# EAGLE board DAC_GainOutputStage3 (EAGLE 9.6.2)
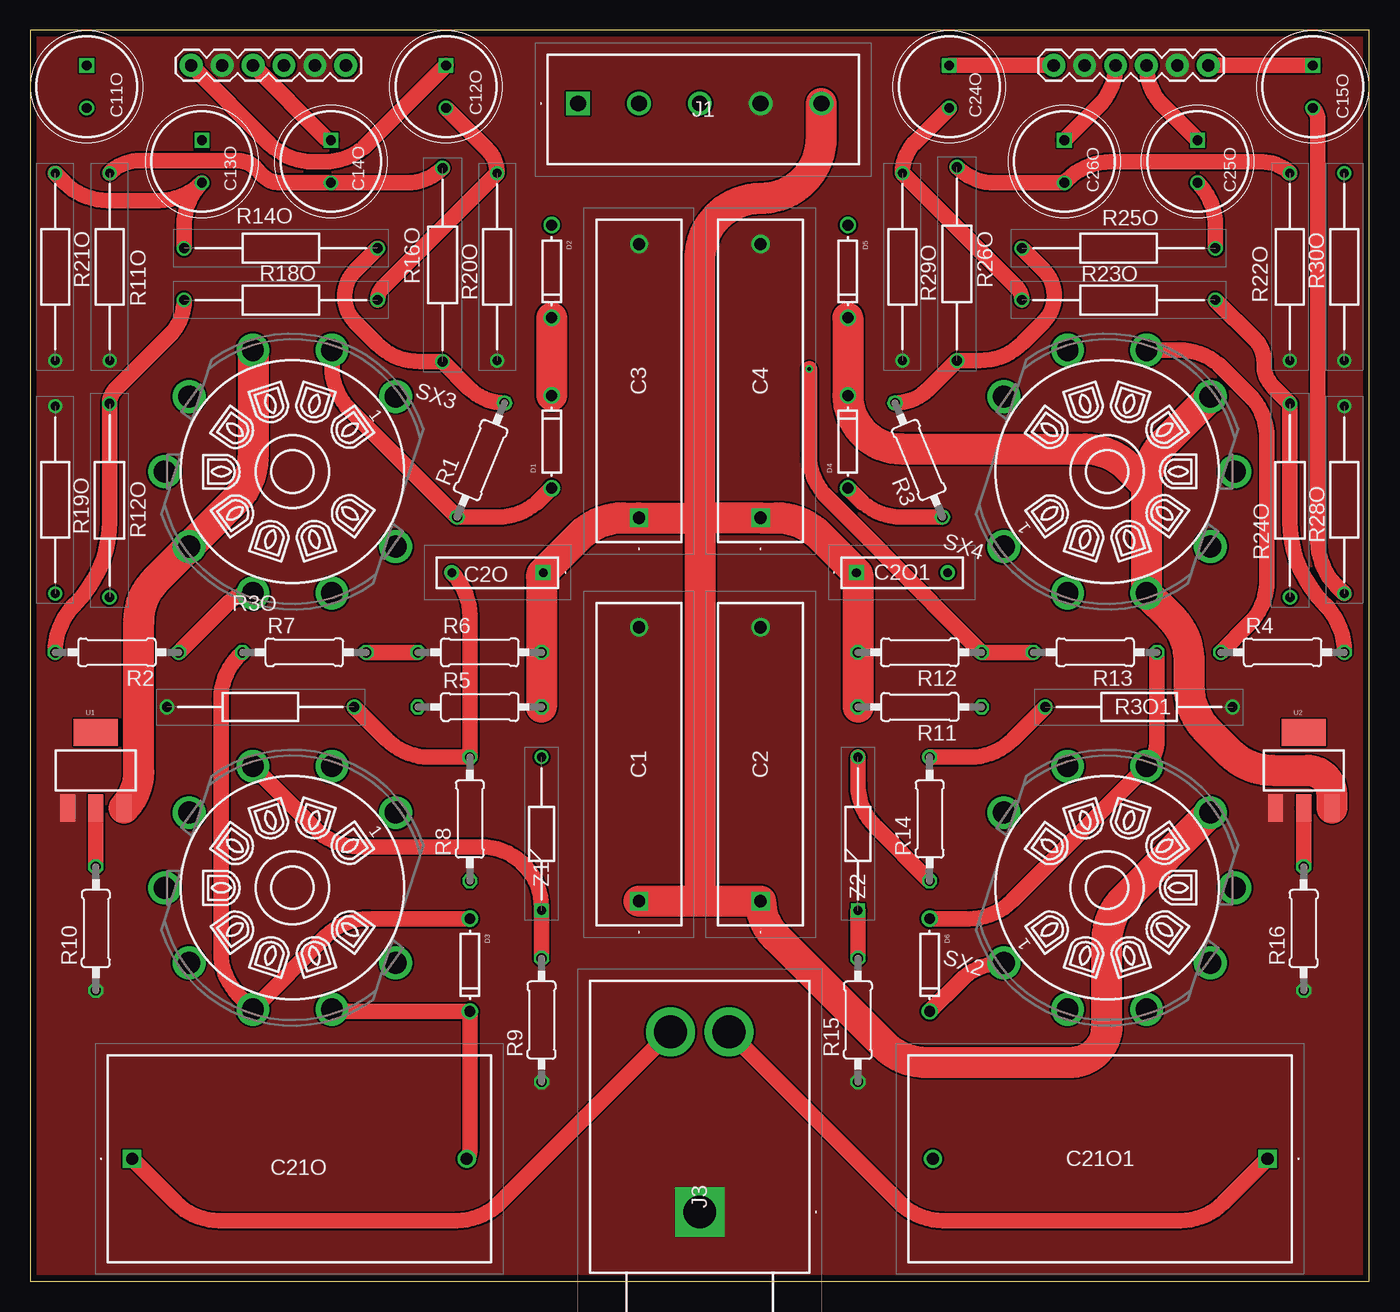
[diagram p0: board, top side]
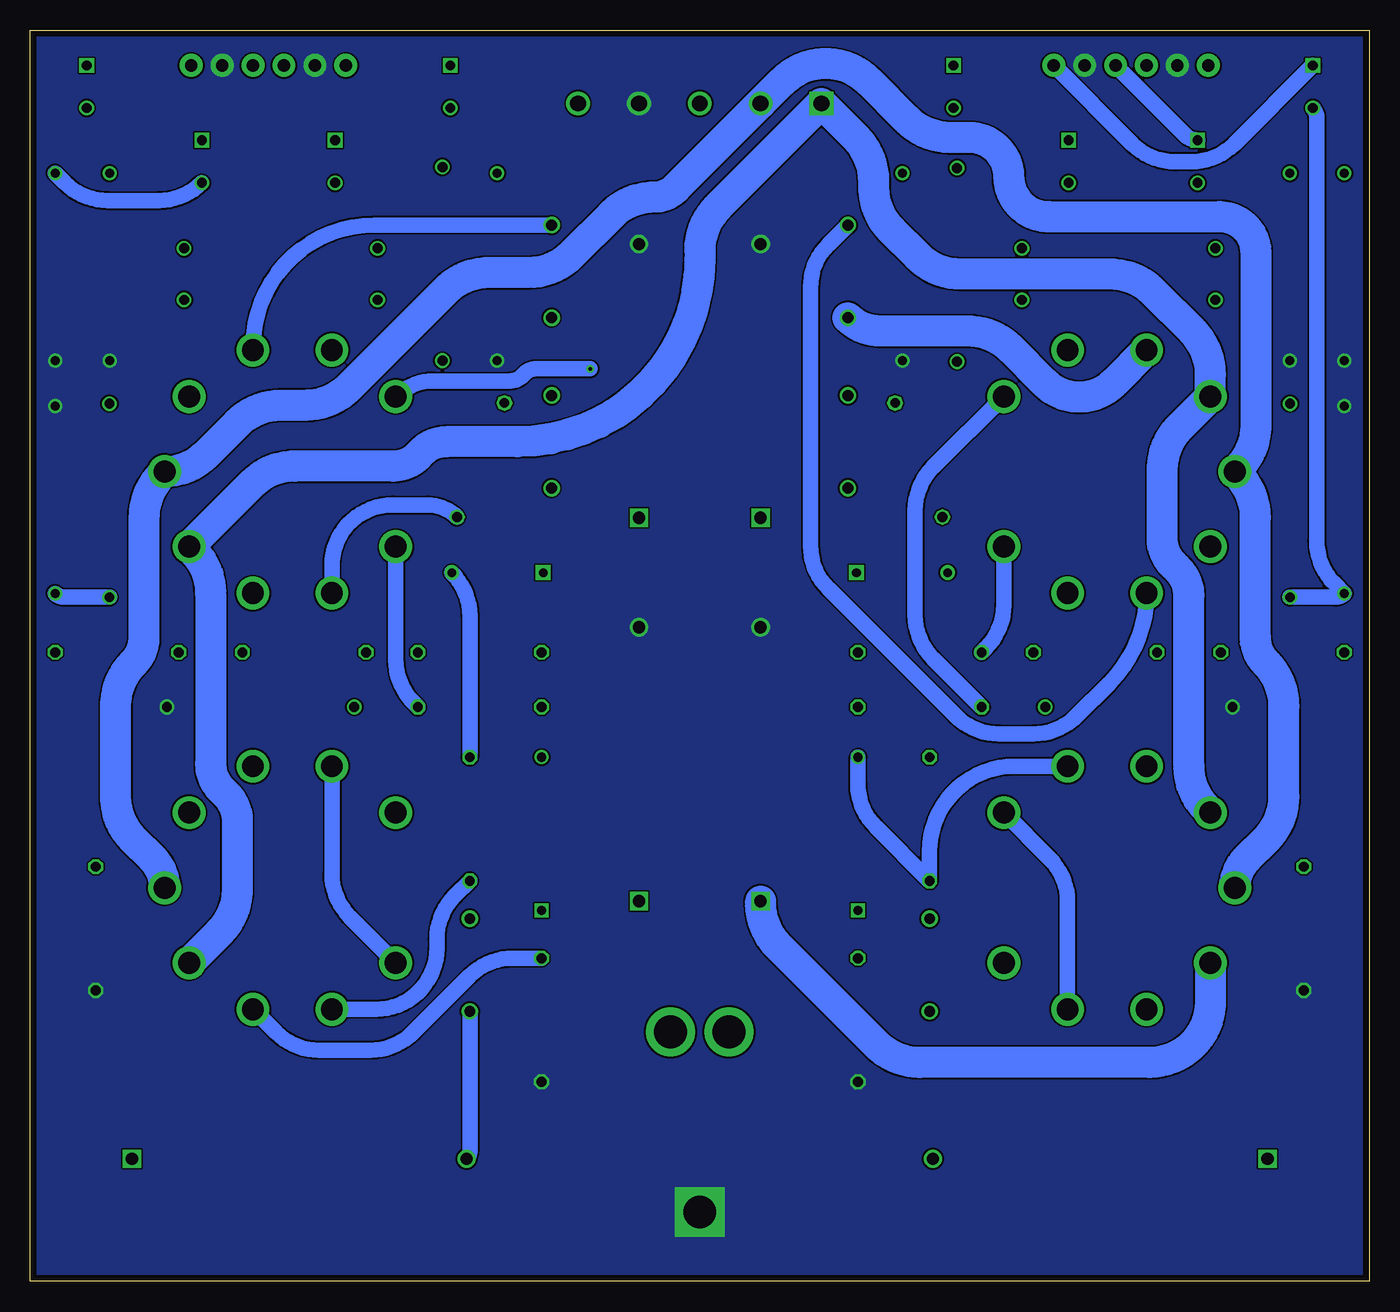
[diagram p1: board, bottom side, seen from below]

Size 110 x 102.8 mm. Coordinates in mm from the lower left corner, seen from the top.
Outline: 0,0 110,0 110,102.8 0,102.8 0,0
Copper layers (1*16): Top 0.035mm / dielectric 1.6mm / Bottom 0.035mm
Design rules "Elecrow_2-layer_PCB_eagle_rule": minimum track width 6mil, minimum drill 12mil, track to track 6mil, track to pad 6mil, pad to pad 6mil, via to via 8mil, smd to smd 0mil, copper to edge 20mil, drill to drill 10mil, minimum pad ring 6mil, minimum via ring 6mil, stop-mask expansion 0mil, vias tented up to drill 100mil, thermal gap 10mil
Net classes: 1 Signal: width 1.272 mm; 2 Power: width 2.54 mm

## Footprints (pad centres in the part's own frame; a part is rotated, then mirrored left to right if it is on the bottom)
MKP4G034705D00KSSD = drill 1 pad 1.5 square: 1 0,0 | drill 1 pad 1.5: 2 22.5,0
MKS4B031002A00JC00 = drill 0.7 pad 1.2 square: 1 0,0 | drill 0.7 pad 1.2: 2 7.5,0
CAPPRD350W60D825H1300 = drill 0.8 pad 1.2 square: 1 0,0 | drill 0.8 pad 1.2: 2 3.5,0
DCP4G053006ID2KSSD = drill 1 pad 1.5 square: 1 0,0 | drill 1 pad 1.5: 2 27.5,0
DO-1N4148 = drill 0.9: A -3.81,0; C 3.81,0
1935190 = drill 1.3 pad 1.95 square: 1 0,0 | drill 1.3 pad 1.95: 2 5,0; 3 10,0; 4 15,0; 5 20,0
1X06 = drill 1.016 pad 1.88: 1 0,0; 2 2.54,0; 3 5.08,0; 4 7.62,0; 5 10.16,0; 6 12.7,0
SJ63033A = drill 2.69 pad 4.035 square: 1 0,0 | drill 2.69 pad 4.035: 2 14.8,-2.4; 3 14.8,2.4
0207/10 = drill 0.813 octagon: 1 -5.08,0; 2 5.08,0
RESAD1540W60L620D230 = drill 0.8 pad 1.2: 1 0,0; 2 15.4,0
RESAD1540W55L620D230 = drill 0.75 pad 1.15: 1 0,0; 2 15.4,0
RESAD1590W60L630D240 = drill 0.8 pad 1.2: 1 0,0; 2 15.9,0
VT9-PT = drill 1.8 pad 2.4: 1 6.172,8.495; 2 0,10.5; 3 -6.172,8.495; 4 -9.986,3.245; 5 -9.986,-3.245; 6 -6.172,-8.495; 7 0,-10.5; 8 6.172,-8.495; 9 9.986,-3.244
SOT223 = smd 1.219 x 2.235: 1 -2.311,-3.099; 2 0,-3.099; 3 2.311,-3.099 | smd 3.6 x 2.2: 4 0,3.099
DIOAD1256W56L444D203 = drill 0.75 pad 1.15 square: 1 0,0 | drill 0.75 pad 1.15: 2 12.6,0

## Placement (x,y rotation side)
C1  MKP4G034705D00KSSD  [MKP4G034705D00KSSD]  50,31.25 90 top
C2  MKP4G034705D00KSSD  [MKP4G034705D00KSSD]  60,31.25 90 top
C2O  0.1uF, 35V  [MKS4B031002A00JC00]  42.12,58.25 180 top
C2O1  0.1uF, 35V  [MKS4B031002A00JC00]  67.88,58.25 0 top
C3  MKP4G034705D00KSSD  [MKP4G034705D00KSSD]  50,62.75 90 top
C4  MKP4G034705D00KSSD  [MKP4G034705D00KSSD]  60,62.75 90 top
C11O  100uF  [CAPPRD350W60D825H1300]  4.62,99.92 270 top
C12O  100uF  [CAPPRD350W60D825H1300]  34.15,99.92 270 top
C13O  100uF  [CAPPRD350W60D825H1300]  14.08,93.78 270 top
C14O  100uF  [CAPPRD350W60D825H1300]  24.69,93.78 270 top
C15O  100uF  [CAPPRD350W60D825H1300]  105.38,99.92 270 top
C21O  30uF/400V  [DCP4G053006ID2KSSD]  8.35,10.08 0 top
C21O1  30uF/400V  [DCP4G053006ID2KSSD]  101.65,10.08 180 top
C24O  100uF  [CAPPRD350W60D825H1300]  75.5,99.92 270 top
C25O  100uF  [CAPPRD350W60D825H1300]  95.92,93.78 270 top
C26O  100uF  [CAPPRD350W60D825H1300]  84.96,93.78 270 top
D1  [DO-1N4148]  42.83,69 90 top
D2  [DO-1N4148]  42.83,83 270 top
D3  [DO-1N4148]  36.11,26 270 top
D4  [DO-1N4148]  67.17,69 90 top
D5  [DO-1N4148]  67.17,83 270 top
D6  [DO-1N4148]  73.89,26 270 top
J1  1935190  [1935190]  45,96.8 0 top
J2  [1X06]  84.09,99.92 0 top
J3  SJ-63033A  [SJ63033A]  55,5.7 90 top
J13  [1X06]  13.21,99.92 0 top
R1  1k  [0207/10]  37,67.5 67.5 top
R2  1k  [0207/10]  7.11,51.7 180 top
R3  1k  [0207/10]  73,67.5 112.5 top
R3O  1M*  [RESAD1540W60L620D230]  26.61,47.2 180 top
R3O1  1M*  [RESAD1540W60L620D230]  83.39,47.2 0 top
R4  1k  [0207/10]  102.89,51.7 0 top
R5  9.1k  [0207/10]  36.92,47.2 0 top
R6  9.1k  [0207/10]  36.92,51.7 0 top
R7  1k  [0207/10]  22.5,51.7 0 top
R8  1k  [0207/10]  36.11,38 90 top
R9  330  [0207/10]  42,21.48 90 top
R10  48.7  [0207/10]  5.38,29 90 top
R11  9.1k  [0207/10]  73.08,47.2 180 top
R11O  10k  [RESAD1540W55L620D230]  6.5,91.07 270 top
R12  9.1k  [0207/10]  73.08,51.7 180 top
R12O  182  [RESAD1590W60L630D240]  6.5,72.13 270 top
R13  1k  [0207/10]  87.5,51.7 180 top
R14  1k  [0207/10]  73.89,38 90 top
R14O  182  [RESAD1590W60L630D240]  28.53,84.9 180 top
R15  330  [0207/10]  68,21.48 90 top
R16  48.7  [0207/10]  104.62,29 90 top
R16O  182  [RESAD1590W60L630D240]  33.86,75.59 90 top
R18O  182  [RESAD1590W60L630D240]  12.63,80.65 0 top
R19O  10k  [RESAD1540W55L620D230]  2.03,71.93 270 top
R20O  10k  [RESAD1540W55L620D230]  38.35,91.07 270 top
R21O  10k  [RESAD1540W55L620D230]  2.03,75.67 90 top
R22O  10k  [RESAD1540W55L620D230]  103.5,91.07 270 top
R23O  182  [RESAD1590W60L630D240]  97.37,80.65 180 top
R24O  182  [RESAD1590W60L630D240]  103.5,72.13 270 top
R25O  182  [RESAD1590W60L630D240]  81.47,84.9 0 top
R26O  182  [RESAD1590W60L630D240]  76.14,75.67 90 top
R28O  10k  [RESAD1540W55L620D230]  107.97,71.93 270 top
R29O  10k  [RESAD1540W55L620D230]  71.65,91.07 270 top
R30O  10k  [RESAD1540W55L620D230]  107.97,75.67 90 top
SX1  VT9-PT  [VT9-PT]  21.53,32.35 342 top
SX2  VT9-PT  [VT9-PT]  88.47,32.35 162 top
SX3  VT9-PT  [VT9-PT]  21.53,66.55 342 top
SX4  VT9-PT  [VT9-PT]  88.47,66.55 162 top
U1  V_REG_317SMD  [SOT223]  5.38,42 0 top
U2  V_REG_317SMD  [SOT223]  104.62,42 0 top
Z1  1N750  [DIOAD1256W56L444D203]  42,30.48 90 top
Z2  1N750  [DIOAD1256W56L444D203]  68,30.48 90 top

## Library data of the parts
C1-C4 = Dual Mono Amp Library; DESCRIPTION: 0.47 F Film Capacitor 220V 400V Polypropylene (PP), Metallized Radial; HEIGHT: 16.5mm; MANUFACTURER_NAME: WIMA; MANUFACTURER_PART_NUMBER: MKP4G034705D00KSSD; MOUSER_PART_NUMBER: 505-MKP4G034705DKSSD; MOUSER_PRICE-STOCK: http://www.mouser.com/Search/ProductDetail.aspx?qs=sJjjjplDs9uaOctv9bTMfA%3d%3d
C2O C2O1 = Dual Mono Amp Library; DESCRIPTION: Film Capacitors MKS 4 0.1 uF 50 VDC 2.5x7x10 PCM 7.5; HEIGHT: 7mm; MANUFACTURER_NAME: WIMA; MANUFACTURER_PART_NUMBER: MKS4B031002A00JC00; MOUSER_PART_NUMBER: 505-MKS4B0312AJC; MOUSER_PRICE-STOCK: https://www.mouser.co.uk/ProductDetail/WIMA/MKS4B031002A00JC00?qs=2G4irm%2FqADy9MV8AUfKNYA%3D%3D
C11O C12O C13O C14O C15O C24O C25O C26O = Dual Mono Amp Library; ARROW_PART_NUMBER: UFW1H101MPD1TD; ARROW_PRICE-STOCK: https://www.arrow.com/en/products/ufw1h101mpd1td/nichicon; DESCRIPTION: Aluminum Electrolytic Capacitors - Radial Leaded 100uF 50 Volts 20%; HEIGHT: 13mm; MANUFACTURER_NAME: Nichicon; MANUFACTURER_PART_NUMBER: UFW1H101MPD1TD; MOUSER_PART_NUMBER: 647-UFW1H101MPD1TD; MOUSER_PRICE-STOCK: https://www.mouser.co.uk/ProductDetail/Nichicon/UFW1H101MPD1TD?qs=WJSLByB5Mu30jPPJ2KiG3A%3D%3D
C21O C21O1 = Dual Mono Amp Library; DESCRIPTION: Film Capacitors DC-LINK MKP 4 30.0 uF 400 VDC 17x34.5x31.5 PCM 27.5; HEIGHT: 34.5mm; MANUFACTURER_NAME: WIMA; MANUFACTURER_PART_NUMBER: DCP4G053006ID2KSSD; MOUSER_PART_NUMBER: 505-DCP4G0536ID2KSSD; MOUSER_PRICE-STOCK: https://www.mouser.co.uk/ProductDetail/WIMA/DCP4G053006ID2KSSD?qs=RB4whv9F6rwxZ2Ey0tRejg%3D%3D
D1-D6 = adafruit
J1 = Dual Mono Amp Library; DESCRIPTION: PCB terminal block, nominal current: 17.5 A, rated voltage (III/2): 400 V, nominal cross section: 1.5 mm?, Number of potentials: 5, Number of rows: 1, Number of positions per row: 5, product range: PT 1,5/..-H, pitch: 5 mm, connection method: Screw connection with wire protector, mounting: Wave soldering, conductor/PCB connection direction: 0 ?, color: green, Pin layout: Linear pinning, Solder pin [P]: 3.5 mm, type of packaging: packed in cardboard; HEIGHT: 11.55mm; MANUFACTURER_NAME: Phoenix Contact; MANUFACTURER_PART_NUMBER: 1935190; MOUSER_PART_NUMBER: 651-1935190; MOUSER_PRICE-STOCK: https://www.mouser.co.uk/ProductDetail/Phoenix-Contact/1935190?qs=QWULklcAmSS%2FS46GSzyZOw%3D%3D
J2 J13 = Dual Mono Amp Library; PROD_ID: CONN-08437
J3 = Dual Mono Amp Library; DESCRIPTION: 6.35 mm, Stereo, Right Angle, Through Hole Mount, 3 Conductors, 0 Internal Switches, Audio Jack Connector; HEIGHT: 12.3mm; MANUFACTURER_NAME: CUI Devices; MANUFACTURER_PART_NUMBER: SJ-63033A
R1-R16 = rcl; SPICEPREFIX: R
R3O R3O1 = Dual Mono Amp Library; DESCRIPTION: TE Connectivity Axial Metal Film Resistor 1m +/-1% 0.6W +/-50ppm/C; HEIGHT: mm; MANUFACTURER_NAME: TE Connectivity; MANUFACTURER_PART_NUMBER: LR1F1M0; MOUSER_PART_NUMBER: 279-LR1F1M0; MOUSER_PRICE-STOCK: https://www.mouser.co.uk/ProductDetail/TE-Connectivity-Holsworthy/LR1F1M0?qs=ip69W3eHERVt%2FmQVAugcSg%3D%3D
R11O R19O R20O R21O R22O R28O R29O R30O = Dual Mono Amp Library; DESCRIPTION: Metal film resistor, 10K 0.6W TE Connectivity LR1F Series Axial Metal Film Resistor 10k; HEIGHT: mm; MANUFACTURER_NAME: TE Connectivity; MANUFACTURER_PART_NUMBER: LR1F10K; MOUSER_PART_NUMBER: 279-LR1F10K; MOUSER_PRICE-STOCK: https://www.mouser.co.uk/ProductDetail/TE-Connectivity-Holsworthy/LR1F10K?qs=ip69W3eHERWDLLWs2Qv0Lg%3D%3D
R12O R14O R16O R18O R23O R24O R25O R26O = Dual Mono Amp Library; DESCRIPTION: Metal Film Resistors - Through Hole 0.6W 1% 182 ohm 50pp m; HEIGHT: mm; MANUFACTURER_NAME: YAGEO; MANUFACTURER_PART_NUMBER: MF0207FTE52-182R
SX1-SX4 = Dual Mono Amp Library
U1 U2 = SparkFun-IC-Power
Z1 Z2 = 1N750; DESCRIPTION: Zener Diodes Voltage Regulator; HEIGHT: mm; MANUFACTURER_NAME: Microsemi Corporation; MANUFACTURER_PART_NUMBER: 1N750; MOUSER_PART_NUMBER: 494-1N750(DO-35); MOUSER_PRICE-STOCK: https://www.mouser.co.uk/ProductDetail/Microchip-Microsemi/1N750?qs=Xwz%252BGKGy4sB1rzIdx4SmVg%3D%3D

## Nets
66.3VAC/1 [Power]: J1.1 SX1.4 SX2.4 SX3.4 SX4.4
66.3VAC/2 [Power]: J1.2 SX1.5 SX2.5 SX3.5 SX4.5
+240VDC [Power]: C1.1 C2.1 C2O1.1 C2O.1 C3.1 C4.1 J1.5 R5.2 R6.2 R11.2 R12.2 SX1.6 SX2.6
AGND [Power]: C1.2 C2.2 C3.2 C4.2 J1.4 J2.2 J2.5 J3.1 J13.2 J13.5 R3O1.2 R3O.2 R9.1 R10.1 R11O.2 R15.1 R16.1 R19O.1 R20O.2 R21O.1 R22O.2 R28O.1 R29O.2 R30O.1 U1.1 U2.1
L+ [Signal]: R4.2 R23O.1 R24O.1
L- [Signal]: R3.2 R25O.1 R26O.1
L_OUT [Signal]: C21O1.1 J3.2
N$1: R6.1 R7.2 SX3.9
N$2: R8.1 SX1.2 Z1.2
N$3: C21O1.2 D6.C SX2.1 SX2.8
N$4: D4.A R3.1 SX4.2
N$5: D5.A R4.1 SX4.7
N$6: D1.A R1.1 SX3.2
N$7 [Power]: D4.C D5.C SX4.3 SX4.6 U2.3
N$8: R11.1 SX4.1
N$9: R12.1 R13.2 SX4.9
N$10: C11O.1 J13.6
N$11: C11O.2 R12O.2 R19O.2
N$12: C15O.1 J2.6
N$13: D2.A R2.1 SX3.7
N$14: R14.1 SX2.2 Z2.2
N$15: C12O.1 J13.1
N$16: C2O.2 R3O.1 R8.2
N$17: C2O1.2 R3O1.1 R14.2
N$18: C21O.2 D3.C SX1.1 SX1.8
N$19: C12O.2 R18O.2 R20O.1
N$20: C15O.2 R24O.2 R28O.2
N$21: C13O.1 J13.4
N$22 [Power]: D1.C D2.C SX3.3 SX3.6 U1.3
N$23: D3.A R7.1 SX1.7
N$24: C14O.1 J13.3
N$25: C14O.2 R11O.1 R16O.2
N$26: R9.2 SX1.3 Z1.1
N$27: R15.2 SX2.3 Z2.1
N$28: C13O.2 R14O.2 R21O.2
N$29: D6.A R13.1 SX2.7
N$30: C24O.1 J2.1
N$31: C24O.2 R23O.2 R29O.1
N$32: C25O.1 J2.4
N$33: C26O.1 J2.3
N$34: C26O.2 R22O.1 R26O.2
N$35: R5.1 SX3.1
N$36: C25O.2 R25O.2 R30O.2
N$37: R10.2 U1.2
N$38: R16.2 U2.2
PE [Power]: J1.3
R+ [Signal]: R2.2 R12O.1 R18O.1
R- [Signal]: R1.2 R14O.1 R16O.1
R_OUT [Signal]: C21O.1 J3.3

## Tracks (layer width: path | path; a pad name or v marks a point on that pad's centre or on a via)
66.3VAC/1
  Bottom 2.54: SX1.4 13.34,38.83 arc45 14.81,42.37 14.81,56.36 arc-45 15.69,58.49 16.12,58.92 arc45 17,61.04 17,66.68 arc45 15.54,70.22 SX3.4 13.03,74.54 arc-45 14.5,78.07 17.74,81.31 arc-45 21.27,82.77 33.55,82.77 arc45 37.09,84.24 39.24,86.39 arc45 40.7,89.92 40.7,90.43 arc-45 42.16,93.96 J1.1 53.54,88.26 arc-45 55,84.73 55,84 arc90 70,69 75.84,69 arc-45 77.82,68.18 78.18,67.82 arc45 80.16,67 88.27,67 arc-45 91.81,65.54 SX4.4 96.66,60.07 arc45 95.19,56.53 95.19,42.54 arc-45 94.31,40.41 93.88,39.98 arc45 93,37.86 93,32.22 arc45 94.46,28.68 SX2.4
66.3VAC/2
  Bottom 2.54: SX2.5 arc-45 99.96,34.74 101.54,36.31 arc45 103,39.85 103,47.28 arc45 101.54,50.82 arc-45 100.65,52.94 100.65,62.8 arc45 99.19,66.33 SX4.5 arc-45 95.56,67.96 92.99,70.54 arc45 89.45,72 87.37,72 arc-45 83.84,73.46 75.86,81.44 arc45 72.33,82.9 69.07,82.9 arc-45 65.54,84.36 62.26,87.64 arc45 58.73,89.1 arc-45 56.97,89.83 J1.2 48.19,98.61 arc90 41.11,98.61 37.96,95.46 arc-45 34.43,94 32.85,94 arc90 29.6,90.75 arc-90 26.35,87.5 12.3,87.5 arc90 9.3,84.5 9.3,70.35 arc45 10.76,66.81 SX3.5 10.81,66.33 arc45 9.35,62.8 9.35,52.94 arc-45 8.46,50.82 arc45 7,47.28 7,39.85 arc45 8.46,36.31 10.04,34.74 arc-45 SX1.5
+240VDC
  Top 2.54: 55,62.75 C3.1 48.7,62.75 arc45 45.16,61.29 C2O.1 arc45 42,57.95 R6.2 R5.2 | 55,62.75 C4.1 61.3,62.75 arc-45 64.84,61.29 C2O1.1 arc-45 68,57.95 R12.2 R11.2 | C1.1 55,31.25 | 55,31.25 C2.1 arc45 61.2,28.35 70.09,19.46 arc45 73.62,18 85.47,18 arc90 88.47,21 88.47,27.96 arc-45 89.94,31.49 SX2.6 | J1.5 65,94 arc-90 60,89 arc90 55,84 55,62.75 | 55,62.75 55,31.25
  Bottom 2.54: SX1.6 13.03,23 arc90 18.03,18 36.93,18 arc45 40.46,19.46 48.54,27.54 arc45 50,31.07 C1.1
AGND
  pour Bottom (rank 6, no thermals): 0,0 110,0 110,102.8 0,102.8
  pour Top (rank 6, no thermals): 0,0 110,0 110,102.8 0,102.8
L+
  Top 1.272: R23O.1 100.64,77.38 arc-45 101.37,75.61 101.37,75.3 arc45 102.1,73.53 R24O.1 103.5,62.49 arc45 106.32,55.68 arc-45 R4.2
L-
  Top 1.272: R3.2 arc45 73.8,73.33 R26O.1 78,75.67 arc45 81.53,77.13 83.26,78.86 arc90 83.26,83.11 R25O.1
L_OUT
  Top 1.272: J3.2 71.44,6.46 arc45 74.97,5 94.5,5 arc45 98.03,6.46 C21O1.1
N$1
  Top 1.272: R7.2 R6.1
  Bottom 1.272: SX3.9 30.02,55.59 arc45 31.49,52.05 R6.1
N$2
  Bottom 1.272: Z1.2 42,40.88 arc-45 40.54,37.35 R8.1 36.11,35.34 arc90 29.11,42.34 SX1.2
N$3
  Top 1.272: D6.C 76.42,24.71 arc-45 79.95,26.18 SX2.1
  Bottom 1.272: D6.C 73.89,10.7 arc45 C21O1.2 | SX2.8 85.23,33.5 arc-45 83.76,29.96 SX2.1
N$4
  Top 1.272: D4.A 68.09,64.27 arc45 71.63,62.81 R3.1
  Bottom 1.272: SX4.2 85.23,58.81 arc90 80.23,63.81 77.36,63.81 arc45 R3.1
N$5
  Top 1.272: SX4.7 94.39,76.53 arc-45 97.93,75.07 100.14,72.86 arc-45 101.6,69.33 101.6,57.56 arc-45 100.14,54.02 R4.1
  Bottom 1.272: D5.A 81.72,86.81 arc-90 91.72,76.81 SX4.7
N$6
  Top 1.272: D1.A 41.91,64.27 arc-45 38.37,62.81 R1.1 26.24,71.63 arc-45 24.77,75.16 SX3.2
N$7
  Top 2.54: D5.C D4.C arc90 71.58,68.4 86.65,68.4 arc-45 90.18,66.94 91.72,65.4 | SX4.6 93.18,68.94 arc45 91.72,65.4 | 91.72,65.4 SX4.3 93.74,54.55 arc-45 95.2,51.01 95.2,48.87 arc45 96.66,45.34 98.54,43.46 arc45 102.07,42 104.94,42 arc-90 106.94,40 U2.3
N$8
  Bottom 1.272: SX4.1 79.98,51.09 arc-45 78.51,47.56 R11.1
N$9  (via drill 0.3)
  Top 1.272: R13.2 R12.1 70.06,59.8 70.06,59.85 65.46,64.44 arc-45 64,67.98 v64,75
  Bottom 1.272: SX4.9 arc45 76.89,74 70.58,74 arc-45 69.59,74.41 69.41,74.59 arc45 68.42,75 v64,75
N$10
  Bottom 1.272: C11O.1 11.09,93.46 arc45 14.62,92 15.92,92 arc45 19.45,93.46 J13.6
N$11
  Bottom 1.272: R12O.2 2.75,56.23 arc-45 R19O.2 2.84,57.34 arc45 4.3,60.87 4.3,95.64 arc-45 C11O.2
N$12
  Top 1.272: J2.6 C15O.1
N$13
  Top 1.272: R2.1 16.19,55.7 arc-45 SX3.7
  Bottom 1.272: D2.A 44.44,85.2 arc-45 45.9,81.66 45.9,60.47 arc-45 44.44,56.94 33.96,46.46 arc-45 30.43,45 27.57,45 arc-45 24.03,46.46 21.36,49.14 arc-45 SX3.7
N$14
  Top 1.272: R14.1 69.46,37.35 arc-45 68,40.88 Z2.2
  Bottom 1.272: R14.1 75.14,31.68 arc-45 76.6,28.14 76.6,27.36 arc90 81.6,22.36 SX2.2
N$15
  Top 1.272: J13.1 19.67,93.46 arc45 23.21,92 24.15,92 arc45 27.69,93.46 C12O.1
N$16
  Top 1.272: R3O.1 29.27,44.54 arc45 32.8,43.08 R8.2 36.11,54.7 arc45 34.64,58.23 C2O.2
N$17
  Top 1.272: R14.2 77.2,43.08 arc45 80.73,44.54 R3O1.1
  Bottom 1.272: C2O1.2 75.36,58.23 arc45 73.89,54.7 R14.2
N$18
  Top 1.272: C21O.2 arc45 36.11,10.7 D3.C 25.2,22.19 arc-45 SX1.8
  Bottom 1.272: SX1.1 26.24,34.74 arc45 24.77,31.2 SX1.8
N$19
  Top 1.272: C12O.2 37.54,93.03 arc-45 R20O.1 28.95,81.67 arc45 R18O.2
N$20
  Top 1.272: R28O.2 107.26,57.23 arc-45 105.8,60.77 105.8,95.4 arc45 C15O.2
  Bottom 1.272: R28O.2 arc-45 107.25,56.23 R24O.2
N$21
  Bottom 1.272: C13O.1 arc45 15.12,94.21 J13.4
N$22
  Top 2.54: D2.C D1.C | SX3.3 18.28,67.7 arc-45 16.82,64.16 SX3.6 10.36,57.71 arc45 8.9,54.17 8.9,41.83 arc-45 U1.3
  Bottom 2.54: D2.C arc-45 40.19,78.1 32.97,78.1 arc45 29.44,76.64 26.64,73.84 arc-90 20.98,73.84 SX3.3
N$23
  Top 1.272: D3.A 27.8,29.81 arc45 24.26,28.35 SX1.7 17.12,23.53 arc-45 15.66,27.06 15.66,47.86 arc-45 17.12,51.4 R7.1
N$24
  Top 1.272: J13.3 24.26,93.96 arc45 C14O.1
N$25
  Top 1.272: R16O.2 arc-45 30.94,90.28 C14O.2 20.52,90.28 arc-45 19.1,90.87 18.45,91.51 arc45 17.04,92.1 8.99,92.1 arc45 R11O.1
N$26
  Top 1.272: R9.2 Z1.1 42,30.72 arc90 37,35.72 26.97,35.72 arc-45 23.43,37.19 SX1.3
N$27
  Top 1.272: R15.2 Z2.1
  Bottom 1.272: R15.2 70.37,26.56 arc-45 73.9,25.1 78.54,20.46 arc45 82.07,19 86.28,19 arc45 89.82,20.46 SX2.3
N$28
  Top 1.272: R14O.2 12.63,86.77 arc-45 C13O.2 arc-45 10.57,88.83 6.34,88.83 arc-45 2.81,90.29 R21O.2
N$29
  Top 1.272: D6.A 77.12,29.81 arc45 80.66,31.27 SX2.7 arc45 92.58,44.41 R13.1
N$30
  Top 1.272: J2.1 C24O.1
N$31
  Top 1.272: C24O.2 72.71,93.63 arc45 R29O.1 81.05,81.67 arc-45 R23O.2
N$32
  Top 1.272: J2.4 arc45 93.08,96.62 C25O.1
N$33
  Top 1.272: C26O.1 87.8,96.62 arc45 J2.3
N$34
  Top 1.272: R26O.2 arc45 79.25,90.28 C26O.2 85.21,90.54 arc-45 88.75,92 101.25,92 arc-45 R22O.1
N$35
  Bottom 1.272: SX3.1 35.84,66.91 arc-45 37.3,63.37 37.3,54.73 arc-45 35.84,51.2 R5.1
N$36
  Top 1.272: C25O.2 arc-45 97.37,86.77 R25O.2
  Bottom 1.272: R30O.2 107.19,90.29 arc-45 103.66,88.83 99.42,88.83 arc-45 C25O.2
N$37
  Top 1.272: U1.2 R10.2
N$38
  Top 1.272: U2.2 R16.2
R+
  Top 1.272: R18O.1 arc-45 11.44,77.77 7,73.33 arc45 R12O.1 6.5,62.49 arc-45 3.68,55.68 arc45 R2.2
R-
  Top 1.272: R1.2 arc-45 36.06,73.39 R16O.1 32,75.59 arc-45 28.47,77.05 26.7,78.82 arc-90 26.7,83.06 R14O.1
R_OUT
  Top 1.272: C21O.1 11.96,6.46 arc45 15.5,5 35.03,5 arc45 38.56,6.46 J3.3